# EAGLE board Module-WiFi-M0-v0.3-Board 2 (EAGLE 7.5.0)
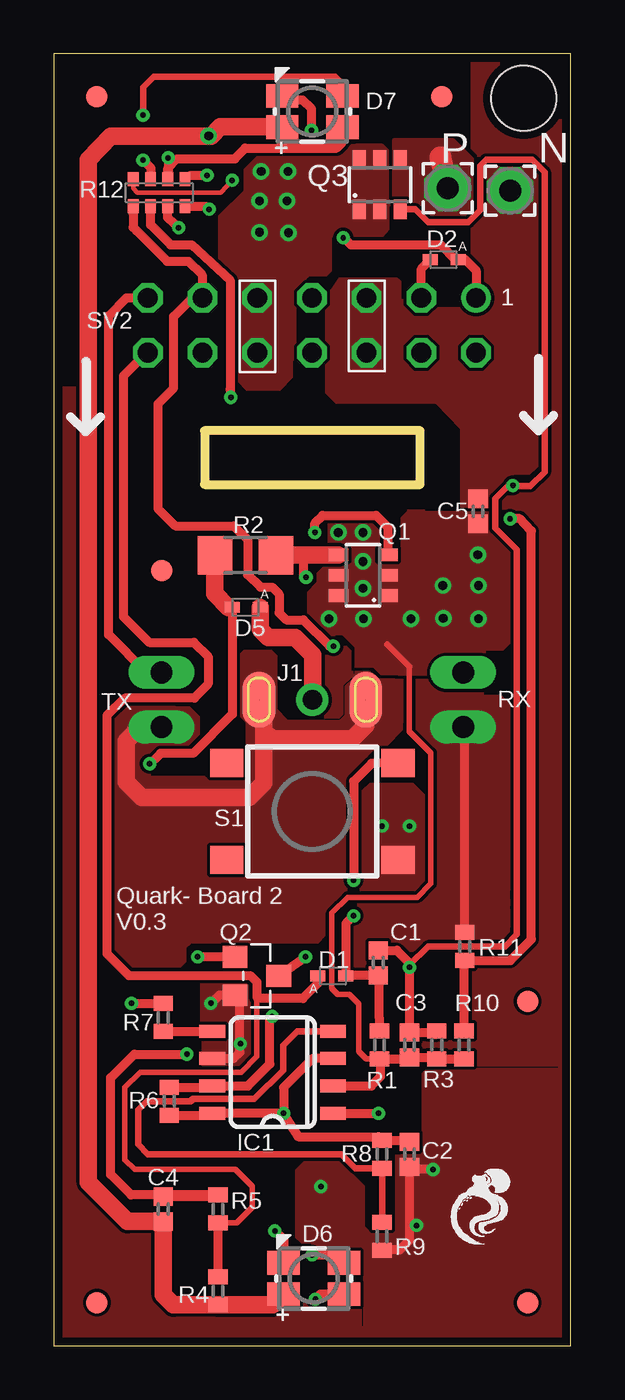
[diagram p0: board, top side]
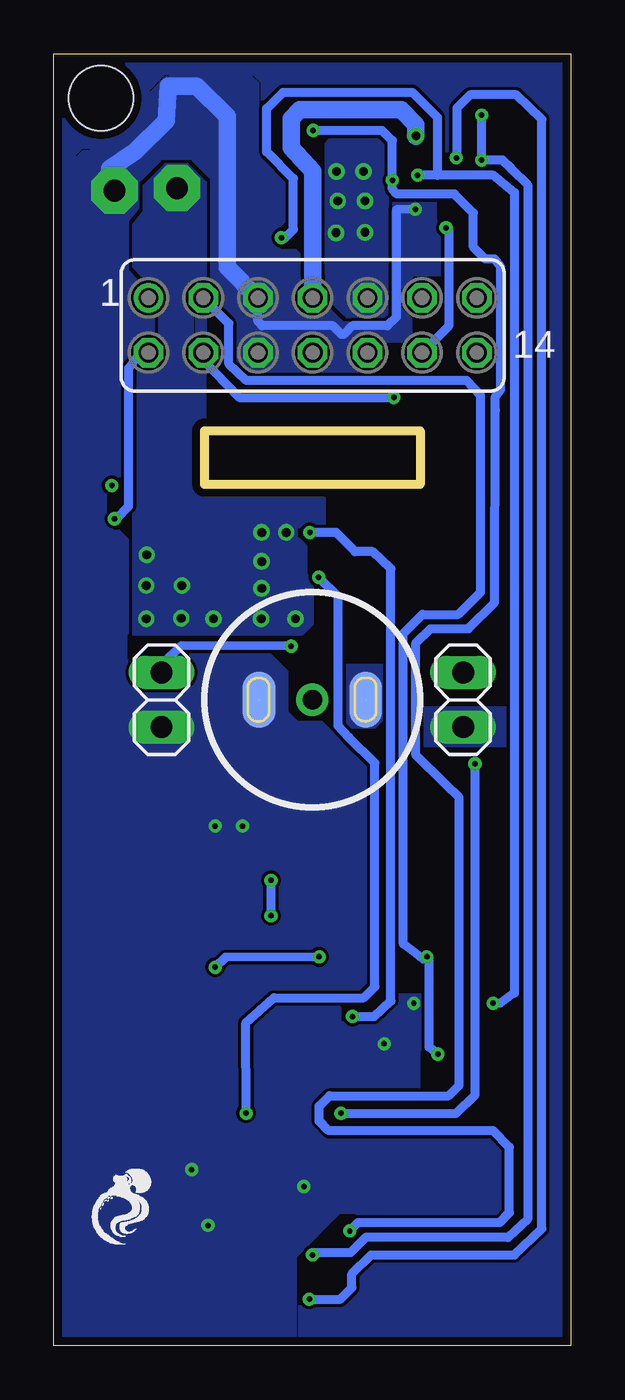
[diagram p1: board, bottom side, seen from below]

Size 24 x 60 mm. Coordinates in mm from the lower left corner, seen from the top.
Outline: 0,60 0,0 24,0 24,60 0,60
Outline: 7,42.5 7,40 17,40 17,42.5 7,42.5
Copper layers (1*16): Top 0.0356mm / dielectric 1.5011mm / Bottom 0.0356mm
Design rules "oshpark-2layer": minimum track width 6mil, minimum drill 10mil, track to track 6mil, track to pad 6mil, pad to pad 6mil, via to via 6mil, smd to smd 6mil, copper to edge 15mil, drill to drill 6mil, minimum pad ring 7mil, minimum via ring 7mil, stop-mask expansion 2.5mil, vias tented up to drill 0mil, thermal gap 10mil
Holes 3 mm at 21.81,57.94
tRestrict: 105 lines
bRestrict: area 3.1,27.5 to 6.9,27.8; area 2.9,29.7 to 6.9,30.3; area 7,16.4 to 8.1,16.6; area 5.9,52.3 to 6.2,53.2; area 8.7,31.7 to 10.5,32.2; 53 lines

## Footprints (pad centres in the part's own frame; a part is rotated, then mirrored left to right if it is on the bottom)
0402-CAP = smd 0.85 x 0.9: 1 -0.58,0; 2 0.58,0
SOD523 = smd 0.7 x 0.5: A 0.7,0; C -0.6,0
LED_RGB_DIFFUSE = smd 1.1 x 1.5: 1-RD -0.725,-1.4; 2-GR -0.725,1.4; 3-BL 0.725,1.4; 4-CA 0.725,-1.4
SOIC-8-TIGHT = smd 0.6 x 1.2: 1 -1.905,-2.8; 2 -0.635,-2.8; 3 0.635,-2.8; 4 1.905,-2.8; 5 1.905,2.8; 6 0.635,2.8; 7 -0.635,2.8; 8 -1.905,2.8
CONN-MAG = smd 1.5 x 2.6 bottom: GND@1 -2.475,0; GND@4 2.475,0 | smd 1.5 x 2.6: GND@2 2.475,0; GND@3 -2.475,0 | drill 0.9 pad 1.5: POS 0,0
2,15/1,0 = drill 1.016 pad 2.159 octagon: 1 0,0
SOT23-6 = smd 0.6 x 0.9: 1 -0.95,-1.15; 2 0,-1.15; 3 0.95,-1.15; 4 0.95,1.15; 5 0,1.15; 6 -0.95,1.15
SOT-23 = smd 1.016 x 1.143: 1 -0.889,-1.016; 2 0.889,-1.016; 3 0,1.016
R0402 = smd 0.7 x 0.9: 1 -0.65,0; 2 0.65,0
R1206 = smd 1.6 x 1.803: 1 -1.422,0; 2 1.422,0
0603-ARV = smd 0.5 x 0.65: 1 -1.2,-0.625; 2 -0.4,-0.625; 3 0.4,-0.625; 4 1.2,-0.625; 5 1.2,0.625; 6 0.4,0.625; 7 -0.4,0.625; 8 -1.2,0.625
1X02 = drill 1.016 long: 1 -1.27,0; 2 1.27,0
TACTILE_SWITCH_TALL = smd 1.55 x 1.3: A1 -3.975,-2.25; A2 3.975,-2.25; B1 -3.975,2.25; B2 3.975,2.25
FE07-2 = drill 0.914: 1 -7.62,1.27 | drill 0.914 octagon: 2 -7.62,-1.27; 3 -5.08,1.27; 4 -5.08,-1.27; 5 -2.54,1.27; 6 -2.54,-1.27; 7 0,1.27; 8 0,-1.27; 9 2.54,1.27; 10 2.54,-1.27; 11 5.08,1.27; 12 5.08,-1.27; 13 7.62,1.27; 14 7.62,-1.27
FIDUCIAL = smd 1 x 1: P$1 0,0

## Placement (x,y rotation side)
C1  0.1uF  [0402-CAP]  15.06,17.78 90 top
C2  0.1uF  [0402-CAP]  16.51,8.89 270 top
C3  0.1uF  [0402-CAP]  16.51,13.97 90 top
C4  0.1uF  [0402-CAP]  5.08,6.35 90 top
C5  0.1uF  [0402-CAP]  19.69,38.75 90 top
D1  PMEG3005EB  [SOD523]  12.95,17.17 180 top
D2  PMEG3005EB  [SOD523]  18.08,50.44 0 top
D5  PMEG3005EB  [SOD523]  8.89,34.29 0 top
D6  [LED_RGB_DIFFUSE]  12.06,3.12 270 top
D7  [LED_RGB_DIFFUSE]  12,57.32 270 top
IC1  BQ2057WSNTR  [SOIC-8-TIGHT]  10.16,12.7 90 top
J1  CONN-CIR_MAG  [CONN-MAG]  12,30 0 bottom
N  WIREPAD2,15/1,0  [2,15/1,0]  21.18,53.64 270 top
P  WIREPAD2,15/1,0  [2,15/1,0]  18.28,53.76 270 top
Q1  IRLTS2242-PMOS  [SOT23-6]  14.36,35.78 90 top
Q2  2N7002-NMOS  [SOT-23]  9.42,17.17 270 top
Q3  IRLTS2242-PMOS  [SOT23-6]  15.14,53.92 0 top
R1  30k  [R0402]  15.11,13.97 270 top
R2  0.5E, 0.5W  [R1206]  8.9,36.71 0 top
R3  300k  [R0402]  17.78,13.97 270 top
R4  300k  [R0402]  7.62,2.54 270 top
R5  300k  [R0402]  7.62,6.35 270 top
R6  3k  [R0402]  5.36,11.35 270 top
R7  3k  [R0402]  5.08,15.24 90 top
R8  3k  [R0402]  15.24,8.89 270 top
R9  3k  [R0402]  15.24,5.08 270 top
R10  30k  [R0402]  19.05,13.97 270 top
R11  3k  [R0402]  19.08,18.54 270 top
R12  500E  [0603-ARV]  4.89,53.55 0 top
RX  [1X02]  19,30 270 bottom
S1  On/Off Sw  [TACTILE_SWITCH_TALL]  12,24.81 0 top
SV2  [FE07-2]  11.98,47.39 0 bottom
TX  [1X02]  5,30 270 bottom
U$1  [OCTO_LOGO]  22.63,4.52 0 bottom
U$2  [OCTO_LOGO]  18.03,4.52 0 top
U$3  FIDUCIAL  [FIDUCIAL]  2,2 0 top
U$4  FIDUCIAL  [FIDUCIAL]  2,58 0 top
U$5  FIDUCIAL  [FIDUCIAL]  18,58 0 top
U$6  FIDUCIAL  [FIDUCIAL]  22,2 0 top
U$7  FIDUCIAL  [FIDUCIAL]  5,36 0 top
U$8  FIDUCIAL  [FIDUCIAL]  22,16 0 top

## Library data of the parts
C1-C5 = 1_ZeroUI; PROD_ID: CAP-12416
D1 D2 D5 = diode
D6 D7 = 1_ZeroUI; VARIANT: ASMB-MTB1-0A3A2-Diffuse
IC1 = 1_ZeroUI; DATASHEETURL: http://www.ti.com/lit/ds/symlink/bq2057c.pdf
J1 Q1 Q3 U$1-U$8 = 1_ZeroUI
N P = wirepad
Q2 = 1_ZeroUI; MPN: 2N7002,215
R1-R11 = rcl
R12 = SparkFun-Passives
RX TX = pinhead
S1 = 1_ZeroUI; PROD_ID: SWCH-11966
SV2 = con-lsta; OC_FARNELL: unknown; OC_NEWARK: unknown

## Nets
3.3V: C4.1 D6.4-CA D7.4-CA R4.2 SV2.7
12V: C2.1 D5.C IC1.3 IC1.8 R2.1 R6.2 R8.1
/RST: SV2.8
CHG_ON: D2.A R7.2 R12.5 SV2.1
GND: C2.2 C5.2 IC1.6 J1.GND@1 J1.GND@2 J1.GND@3 J1.GND@4 N.1 Q2.2 R9.2 R11.1 R12.4 RX.2 S1.A2 SV2.5 SV2.6 TX.2
LED-G: R12.2 SV2.4
N$1: D6.1-RD D7.1-RD R12.8
N$2: D6.2-GR D7.2-GR R12.7
N$3: D6.3-BL D7.3-BL R12.6
N$4: C1.1 D1.C R1.1 S1.B2
N$5: C1.2 C3.2 Q2.3 Q3.3 R3.1
N$6: IC1.5 R7.1
N$7: D5.A J1.POS
N$10: IC1.1 Q1.4 R2.2
N$13: IC1.7 Q1.3 R6.1
PROGL/LED-B: R12.3 SV2.12
PWR_EN: C4.2 D2.C Q2.1 R5.1 SV2.3
RXD/LED-R: R12.1 RX.1 SV2.11
SW_INT: D1.A R4.1 R5.2 SV2.14
TS1: IC1.4 R8.2 R9.1
TXD: SV2.13 TX.1
V_BATT: C3.1 C5.1 IC1.2 P.1 Q1.1 Q1.2 Q1.5 Q1.6 Q3.4 R1.2 R3.2 R10.2
VBATT_SENSE: R10.1 R11.2 SV2.2
VDD: Q3.1 Q3.2 Q3.5 Q3.6 SV2.9 SV2.10

## Tracks (layer width: path | path; a pad name or v marks a point on that pad's centre or on a via)
3.3V  (via drill 0.41)
  Top 0.813: D6.4-CA 10.16,1.89 R4.2 5.55,1.89 5.08,2.36 C4.1 3.41,5.77 1.6,7.58 1.6,55.08 2.63,56.19 v7.19,56.19 7.32,56.19 7.73,56.62 10.53,56.62 D7.4-CA
  Bottom 0.813: SV2.7 11.99,49.73 11.99,54.56 12.98,55.64 12.98,56.99 12.58,57.4 7.88,57.4 7.19,56.71 v7.19,56.19
12V  (via drill 0.25)
  Top 0.406: IC1.3 12.01,13.34 11.56,12.88 10.67,11.99 v10.67,10.79 10.67,10.73 10.76,10.6 | IC1.8 10.7,10.8 10.7,10.7 10.76,10.6 | 10.76,10.6 11.34,9.7 15.08,9.7 R8.1 16.44,9.54 C2.1 | 8.1,34.29 D5.C 8.29,29.33 6.47,27.51 4.95,27.51 4.39,26.95 v4.45,27.03 | 7.47,36.7 R2.1 | R6.2 7.27,10.7 IC1.8
  Top 0.61: IC1.8
  Top 0.813: 8.1,34.29 7.47,34.92 7.47,36.7
  Bottom 0.406: v10.67,10.79 5.31,10.79 4.45,11.66 v4.45,27.03
CHG_ON  (via drill 0.25)
  Top 0.203: R12.5 6.35,54.36
  Top 0.406: v3.61,15.9 3.85,15.89 R7.2 | 19.61,49.28 SV2.1 19.61,49.94 19.1,50.44 D2.A 18.64,50.44 17.96,51.13 13.79,51.13 v13.44,51.46 | 6.35,54.36 v7.11,54.36
  Bottom 0.406: v3.61,15.9 3.28,15.9 2.62,16.38 2.62,53.56 3.59,54.36 6.2,54.36 | v13.44,51.46 13.28,51.44 12.88,51.84 12.88,54.2 14.12,55.45 14.12,57.45 13.36,58.22 7.37,58.22 6.2,57.05 6.2,54.36 | 6.2,54.36 v7.11,54.36
GND  (via drill 0.25)  (2 unrouted)
  Top 0.406: R9.2 15.26,4.45 16.05,4.45 16.51,4.9 C2.2 16.64,8.18 v17.6,8.18 | IC1.6 8.34,13.34 8.64,13.63 8.64,16.05 Q2.2 7.7,16.28 7.42,16 v7.29,15.9 | R11.1 19.08,28.65 RX.2 | 9.75,29.77 J1.GND@4 | 21.29,53.9 20.83,54.48 N.1 | R12.4 7.07,52.92 v7.21,52.78
  Top 0.813: TX.2 3.99,28.73 3.35,28.09 3.35,26.19 4.09,25.45 9.07,25.45 9.75,26.14 9.75,28.55 | 9.75,29.77 9.75,28.55 | 9.75,28.55 10.13,28.17 13.84,28.17 14.48,28.8 J1.GND@3
  Bottom 0.406: v7.21,52.78 8.1,52.76 8.1,47.78 8.51,47.37 10.13,47.37 10.54,46.97 10.64,46.97 11.05,47.37 14.33,47.37 14.53,47.57 SV2.5
  Bottom 0.813: SV2.5 15.95,50.09 15.95,57.09 17.35,58.5 18.68,58.5 18.77,56.89 20.24,55.45 21.41,54.66 21.41,53.65
  other vias: 16.51,24.13 15.24,24.13 16.84,5.59 12.4,7.39 8.66,14.02
  pour Bottom (rank 6, no thermals): -35.56,68.58 73.66,68.58 73.66,-15.24 -35.56,-15.24
  pour Top (rank 6, no thermals): 12.7,44.45 12.7,49.64 13.86,50.8 19.46,50.8 19.46,66.04 34.29,66.04 34.29,-7.62 -19.05,-7.62 -19.05,44.45
LED-G  (via drill 0.25)
  Top 0.406: v8.22,44.04 8.19,44.04 8.18,44.41 8.18,49.48 6.4,51.13 5.42,51.13 4.49,52.06 R12.2
  Bottom 0.406: SV2.4 17.06,45.77 15.38,44.04 v8.22,44.04
N$1  (via drill 0.25)
  Top 0.203: R12.8 3.69,53.76 3.86,53.54 7.75,53.54 v8.28,54.13
  Top 0.406: v10.26,5.33 10.66,4.93 D6.1-RD | 10.51,57.93 D7.1-RD 10.71,57.86 11.55,57.86 11.96,57.45 v11.96,56.44
  Bottom 0.406: v10.26,5.33 9.88,5.71 3.3,5.71 2.85,6.17 2.85,9.22 3.61,9.98 11.23,9.98 11.68,10.44 11.68,11.12 11.2,11.61 5.67,11.61 5.18,12.09 5.18,25.45 5.82,26.09 7.19,27.43 7.19,32.64 6.5,33.3 4.75,33.3 3.53,34.52 3.5,43.43 3.5,44.07 3.25,44.4 3.25,50.11 3.53,50.47 3.96,50.47 4.52,51.03 4.52,52.61 5.4,53.49 8.08,53.49 8.28,53.72 v8.28,54.13 8.29,55.97 8.75,56.44 11.79,56.44 v11.96,56.44
N$2  (via drill 0.25)
  Top 0.305: v4.14,57.15 4.14,58.44 4.63,58.93 13.06,58.93 13.41,58.58 13.44,57.94 D7.2-GR
  Top 0.406: v11.99,4.22 13.1,4.22 D6.2-GR | R12.7 4.52,54.2 4.52,54.69 v4.14,55.07
  Bottom 0.406: v11.99,4.22 11.89,4.32 10.24,4.32 9.53,5.03 2.9,5.03 2.01,5.88 2.01,53.92 2.75,54.63 3.18,55.07 v4.14,55.07 v4.14,57.15 4.09,57.12
N$3  (via drill 0.25)
  Top 0.406: v12.14,2.16 12.38,2.4 D6.3-BL | D7.3-BL 13.39,56.08 13.39,55.88 13.13,55.63 8.88,55.63 8.4,55.12 5.71,55.12 5.29,54.69 R12.6 5.31,54.19 v5.31,55.17
  Bottom 0.406: v12.14,2.16 10.7,2.16 10.16,2.7 10.16,3.33 9.27,4.22 2.62,4.22 1.35,5.44 1.35,56.96 2.53,58.09 4.67,58.09 5.28,57.48 5.28,55.19 v5.31,55.17
N$4  (via drill 0.25)
  Top 0.406: R1.1 15.12,15.2 15.12,16.82 C1.1 13.88,17.2 D1.C 13.56,17.18 13.56,19.61 v13.92,19.96 | S1.B2 14.76,27.05 13.92,26.21 v13.92,21.61
  Bottom 0.406: v13.92,21.61 v13.92,19.96
N$5  (via drill 0.25)
  Top 0.305: 16.51,17.68 17.37,18.54 20.96,18.54 21.49,19.1 21.49,19.36 21.49,20.35 21.49,20.8 21.49,21.05 21.49,36.98 20.5,37.97 20.5,39.34 21.11,39.95 v21.31,39.95 21.31,39.93 22.12,39.93 22.78,40.56 22.78,54.51 22.21,55.08 20.07,55.08 19.79,54.8 19.79,52.73 19.24,52.19 17.38,52.19 16.78,52.77 Q3.3
  Top 0.406: 17.71,14.55 C3.2 v16.51,17.58 16.51,17.68 16.51,17.78 15.93,18.36 C1.2 | Q2.3 v11.68,18.06
  Top 0.61: 17.71,14.55 R3.1
  Bottom 0.406: v11.68,18.06 16.03,18.03 v16.51,17.58
N$6
  Top 0.406: R7.1 7.34,14.59
  Top 0.61: 7.34,14.59 IC1.5
N$7
  Top 0.406: 9.59,33.3 9.6,33.25 | 12.01,30.01 J1.POS
  Top 0.813: D5.A 9.59,33.3 | 9.6,33.25 9.96,32.89 11.2,32.89 12.01,32.08 12.01,30.01
N$10  (via drill 0.25)
  Top 0.406: IC1.1 v15.07,10.79 | v11.71,35.69 11.61,35.79 11.61,36.73
  Top 0.61: 10.38,36.73 R2.2
  Top 0.813: Q1.4 11.61,36.73 10.38,36.73
  Bottom 0.305: 10.8,28.79 10.81,28.98
  Bottom 0.406: v15.07,10.79 15.09,15 13.79,16.15 9.62,16.15 9.1,16.67 9.1,27.05 10.3,28.25 10.8,28.79 10.8,34.78 v11.71,35.69
N$13  (via drill 0.25)
  Top 0.406: R6.1 7.06,12 7.06,12.06 IC1.7 9.01,12.06 10.03,13.09 10.03,15.16 10.13,15.27 v10.13,15.29 | v12.12,37.77 12.12,38.2 12.48,38.56 14.97,38.56 15.51,38.02 Q1.3
  Bottom 0.406: v10.13,15.29 9.13,15.29 8.36,16.01 8.36,36.09 9.2,36.88 10.01,36.88 10.9,37.77 v12.12,37.77
PROGL/LED-B  (via drill 0.25)
  Top 0.406: v5.79,51.92 5.28,52.4 5.29,52.41 R12.3
  Bottom 0.406: v5.79,51.92 5.66,51.82 5.66,47.4 5.74,47.28 SV2.12 6.86,46.08
PWR_EN  (via drill 0.25)
  Top 0.406: C4.2 7.55,6.93 R5.1 3.59,7 2.64,7.95 2.64,12.45 3.73,13.54 v6.17,13.54 | SV2.3 17.06,50.02 D2.C | Q2.1 v6.68,18.06
  Bottom 0.406: v6.17,13.54 6.58,13.87 6.58,17.86 6.81,18.09 6.83,17.96 v6.68,18.06 7,18.06 7.77,18.66 7.77,33.08 6.89,33.96 5.23,33.96 4.19,35 4.19,44.13 4.84,44.83 15.06,44.83 15.88,45.59 15.88,47.47 SV2.3
RXD/LED-R  (via drill 0.25)
  Top 0.406: R12.1 3.68,52.59 3.68,51.94 3.84,51.78 5.26,50.37 6.25,50.37 6.88,49.73 6.88,48.68 SV2.11 6.86,48.62 6.38,48.62 5.56,47.8 5.56,44.48 4.83,43.74 4.83,38.89 5.64,38.08 8.36,38.08 8.99,37.44 8.99,35.81 9.6,35.23 10.13,35.23 10.46,34.9 10.46,34.04 10.79,33.71 11.58,33.71 12.8,32.49 v12.98,32.49
  Bottom 0.406: v12.98,32.49 18.09,32.51 18.97,31.65 RX.1
SW_INT
  Top 0.254: R5.2 8.49,5.7 9.22,6.43 9.22,7.39 8.43,8.18 3.76,8.18 3.3,8.64 3.3,11.99 4.01,12.7 8.69,12.7 9.42,13.43 9.42,16.18
  Top 0.406: R5.2 R4.1 | SV2.14 4.31,46.12 3.23,45.03 3.23,33.86 4.42,32.66 6.5,32.66 7.16,32.01 7.17,30.73 6.53,30.07 3.3,30.07 2.46,29.26 2.46,18.21 3.48,17.2 9.12,17.2 9.42,16.89 9.42,16.18 9.47,16.13 11.56,16.13 12.25,16.83 D1.A
TS1
  Top 0.305: IC1.4 11.3,14.61 10.64,13.95 10.64,12.79 9.31,11.46 6.45,11.46 6.35,11.35 4.32,11.35 3.91,10.95 3.91,9.35 4.37,8.89 13.35,8.89 14,8.24 R8.2 R9.1
TXD
  Top 0.406: TX.1 4.29,31.27 2.54,33.02 2.54,47.83 3.38,48.67 SV2.13
V_BATT  (via drill 0.41)
  Top 0.254: 16.51,31.55 16.51,28.52 17.5,27.53 17.5,21.46 16.87,20.83 13.64,20.83 12.9,20.09 12.9,16.59 13.19,16.31 13.72,16.31 14.15,15.88 14.15,13.66 14.49,13.32 R1.2
  Top 0.305: 15.49,32.57 16.51,31.55
  Top 0.406: IC1.2 14.74,12.06 15.18,12.5 15.18,13.26 R1.2 16.44,13.32 | C3.1 17.71,13.39 | R3.2 R10.2
  Top 0.61: 16.44,13.32 C3.1 | 17.71,13.39 R3.2
  Top 1.016: 17.94,55.18 P.1
  other vias: 19.71,33.76 18.08,33.78 19.71,35.31 14.35,35.18 14.35,36.42 18.06,35.31 14.35,37.77 16.59,33.76 12.78,33.76 14.38,33.76 19.68,36.73 13.21,37.77
  pour Top (rank 5, no thermals): 10.62,38.73 21.41,38.73 21.36,31.19 10.62,31.24
  pour Bottom (no thermals): 11.43,39.37 16.97,39.88 16.95,54.05 17.78,54.88 18.83,54.88 19.84,53.87 19.84,52.68 20.32,52.07 20.32,33.02 11.43,33.02
  pour Top (no thermals): 15.8,52.17 15.8,55.98 18.53,55.98 19.81,54.7 19.81,52.75 19.08,52.08 18.67,52.12
VBATT_SENSE  (via drill 0.25)
  Top 0.406: R10.1 19.05,17.86 R11.2 21.19,17.89 22.17,18.87 22.17,37.84 21.63,38.41 v21.18,38.41
  Bottom 0.406: v21.18,38.41 21.08,38.41 20.52,38.99 20.52,45.39 19.99,46.1 19.62,46.1 SV2.2
VDD  (via drill 0.41)
  other vias: 9.63,54.53 9.55,53.16 10.87,54.53 10.82,53.16 9.55,51.71 10.9,51.69
  pour Top (rank 4, no thermals): -10.16,55.88 -10.16,44.45 11.15,44.45 11.15,49.11 11.82,49.77 13.1,49.76 15.54,51.56 15.54,52.1 15.51,52.13 15.52,53.06 15.49,53.09 15.49,55.46 15.23,55.73
  pour Bottom (no thermals): 8.51,47.68 10.19,47.65 11.86,49.25 11.99,54.58 12.67,56.13 8.56,56.13

## Text on the board
tNames: 1 | Quark- Board 2 / V0.3
Reference: BOTTOM PCB
tDocu: TXD | RXR | VDD | 3.3 | GND | EN | CHG | Sw | Blue | Red | G | Sns